# EAGLE board Automatic night light using NAND gate  (EAGLE 9.7.0)

Size 131.69 x 25.42 mm. Coordinates in mm from the lower left corner, seen from the top.
Outline: 0,0 131.69,0 131.69,25.42 0,25.42 0,0
Copper layers (1*16): Top 0.035mm / dielectric 1.5mm / Bottom 0.035mm
Design rules "default": minimum track width 6mil, minimum drill 0.35mm, track to track 6mil, track to pad 6mil, pad to pad 6mil, via to via 6mil, smd to smd 6mil, copper to edge 40mil, drill to drill 6mil, minimum pad ring 10mil, minimum via ring 8mil, stop-mask expansion 4mil, vias tented up to drill 0mil, thermal gap 10mil

## Footprints (pad centres in the part's own frame; a part is rotated, then mirrored left to right if it is on the bottom)
1X02 = drill 1.016 long: 1 -1.27,0; 2 1.27,0
BATTERY-GENERIC = drill 1.118 pad 3.15 octagon: + 2.54,0; - -2.54,0
RESAD1016W63L850D250B = drill 0.83 pad 1.43: 1 -5.08,0; 2 5.08,0
GL5528 = drill 0.8 pad 1.4: 1 -1.702,0; 2 1.702,0
DIP762W53P254L1969H508Q14B = drill 0.743 pad 1.343: 1 -3.81,7.62; 2 -3.81,5.08; 3 -3.81,2.54; 4 -3.81,0; 5 -3.81,-2.54; 6 -3.81,-5.08; 7 -3.81,-7.62; 8 3.81,-7.62; 9 3.81,-5.08; 10 3.81,-2.54; 11 3.81,0; 12 3.81,2.54; 13 3.81,5.08; 14 3.81,7.62

## Placement (x,y rotation side)
L1  LIGHTBULB  [1X02]  125.98,14.54 0 top
P1  BATTERYGENERIC  [BATTERY-GENERIC]  8.26,12.76 180 top
R2  33k  [RESAD1016W63L850D250B]  49.53,6.33 0 top
R5  330  [RESAD1016W63L850D250B]  90.17,8.87 0 top
R6  PHOTOCELL_GL5528  [GL5528]  43.18,11.41 0 top
U1  74HC00_PDIP  [DIP762W53P254L1969H508Q14B]  72.39,17.76 90 top

## Library data of the parts
L1 P1 R2 R5 R6 U1 = Tinkercad

## Nets
L1_1: L1.1 R5.2
P1+: P1.+ R6.1 U1.14
P1-: L1.2 P1.- R2.2 U1.7
U1_1A: R2.1 R6.2 U1.1 U1.2
U1_1Y: R5.1 U1.3

## Tracks (layer width: path | path; a pad name or v marks a point on that pad's centre or on a via)
L1_1  (1 unrouted)
P1+  (2 unrouted)
P1-  (3 unrouted)
U1_1A  (3 unrouted)
U1_1Y  (1 unrouted)